# Altium PCB BSPD.PcbDoc (part 1 of 2)
Units mm, origin at the board's own origin, x right, y up, seen from the top; angles counter-clockwise.
Board outline 45 x 32.6 mm, 2 copper layers (Top Layer, Bottom Layer); 26 components, 20 nets, 79 pads, 28 vias.
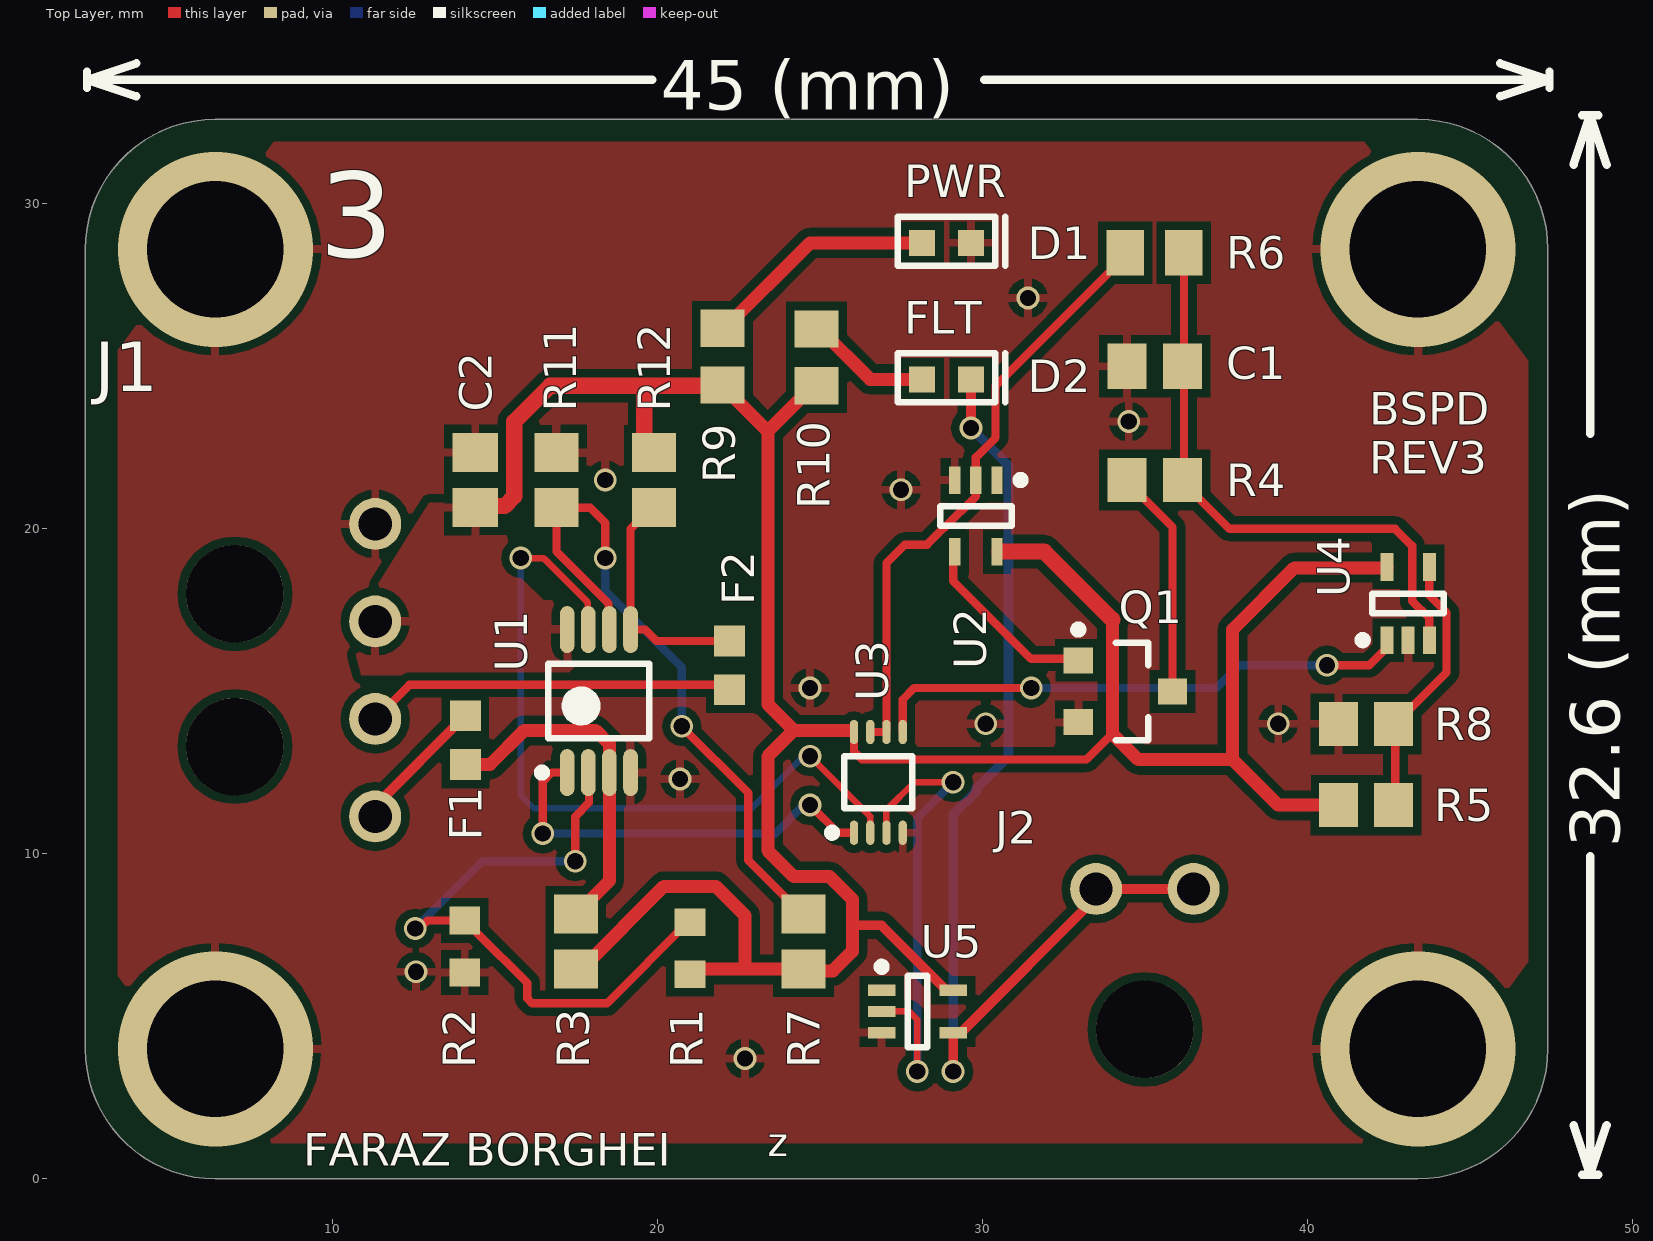
[diagram p0: Top Layer view]
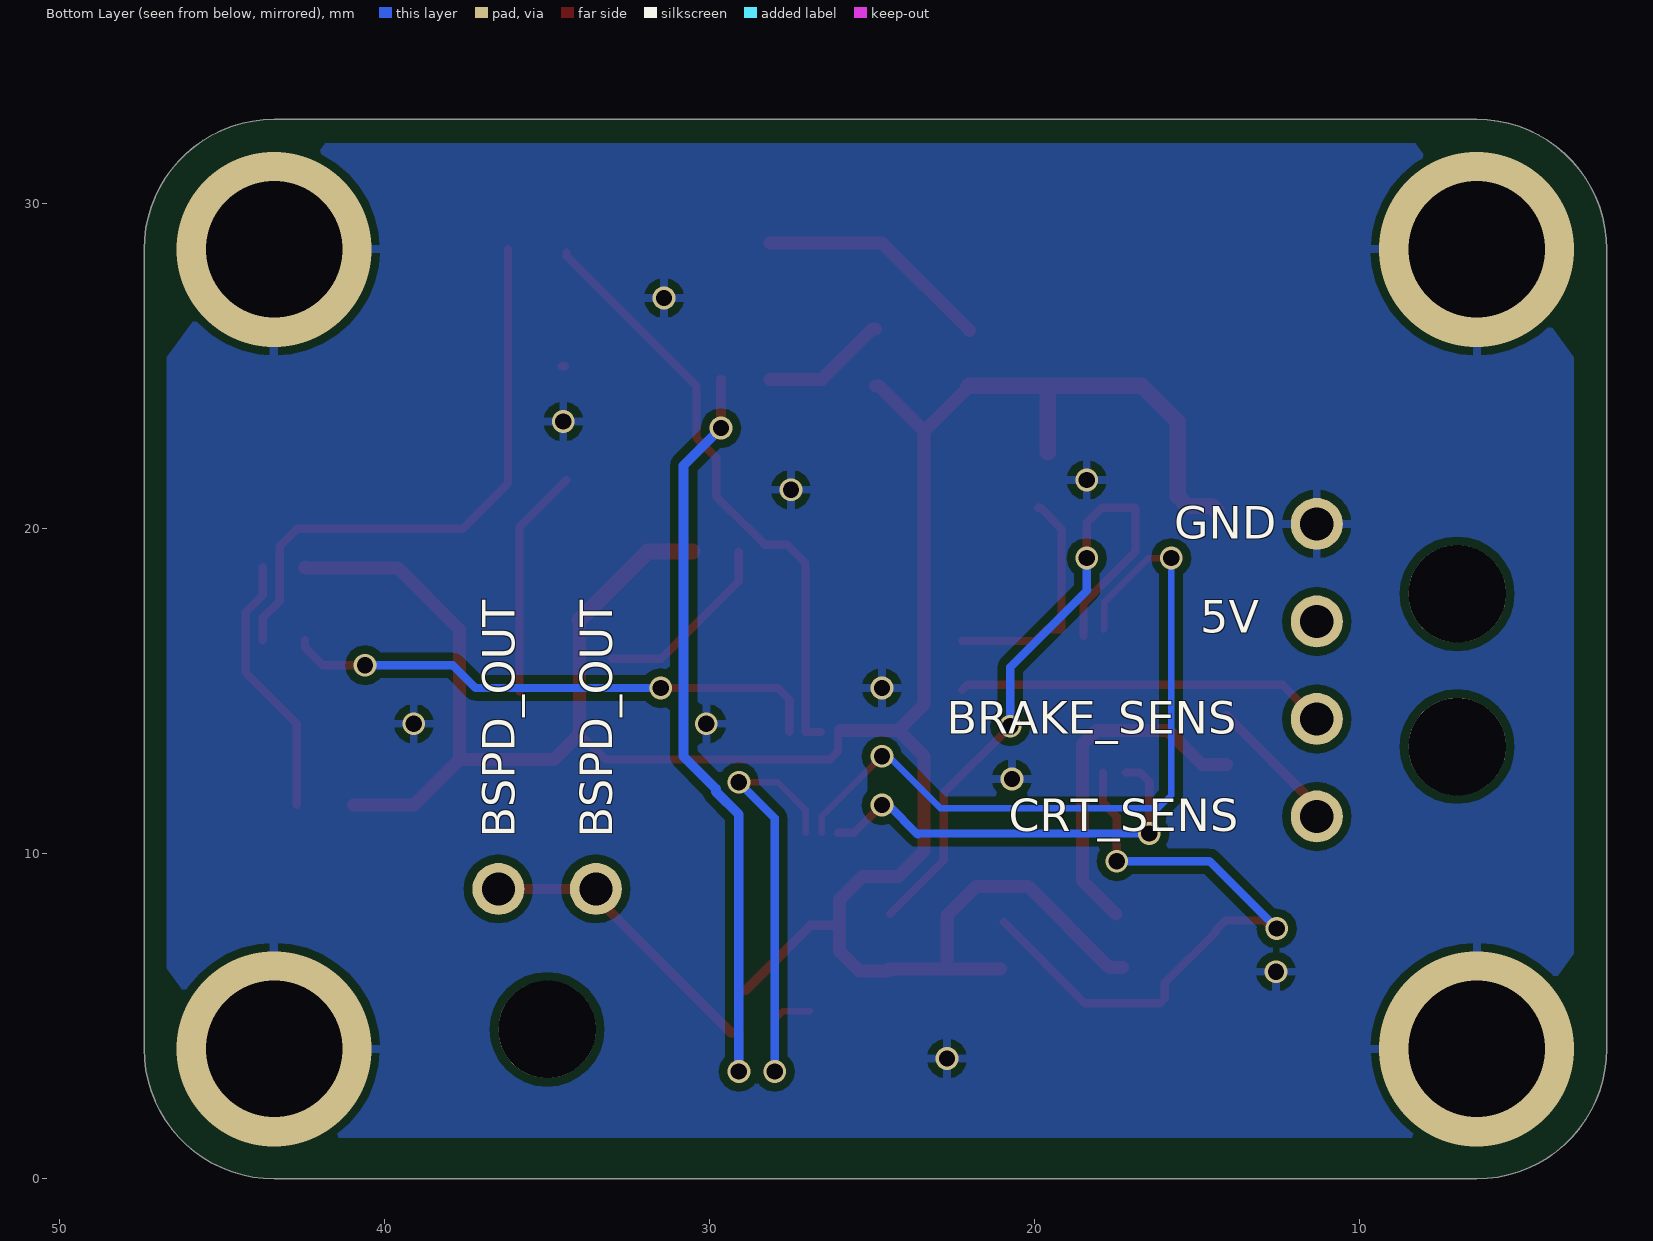
[diagram p1: Bottom Layer view, seen from below]
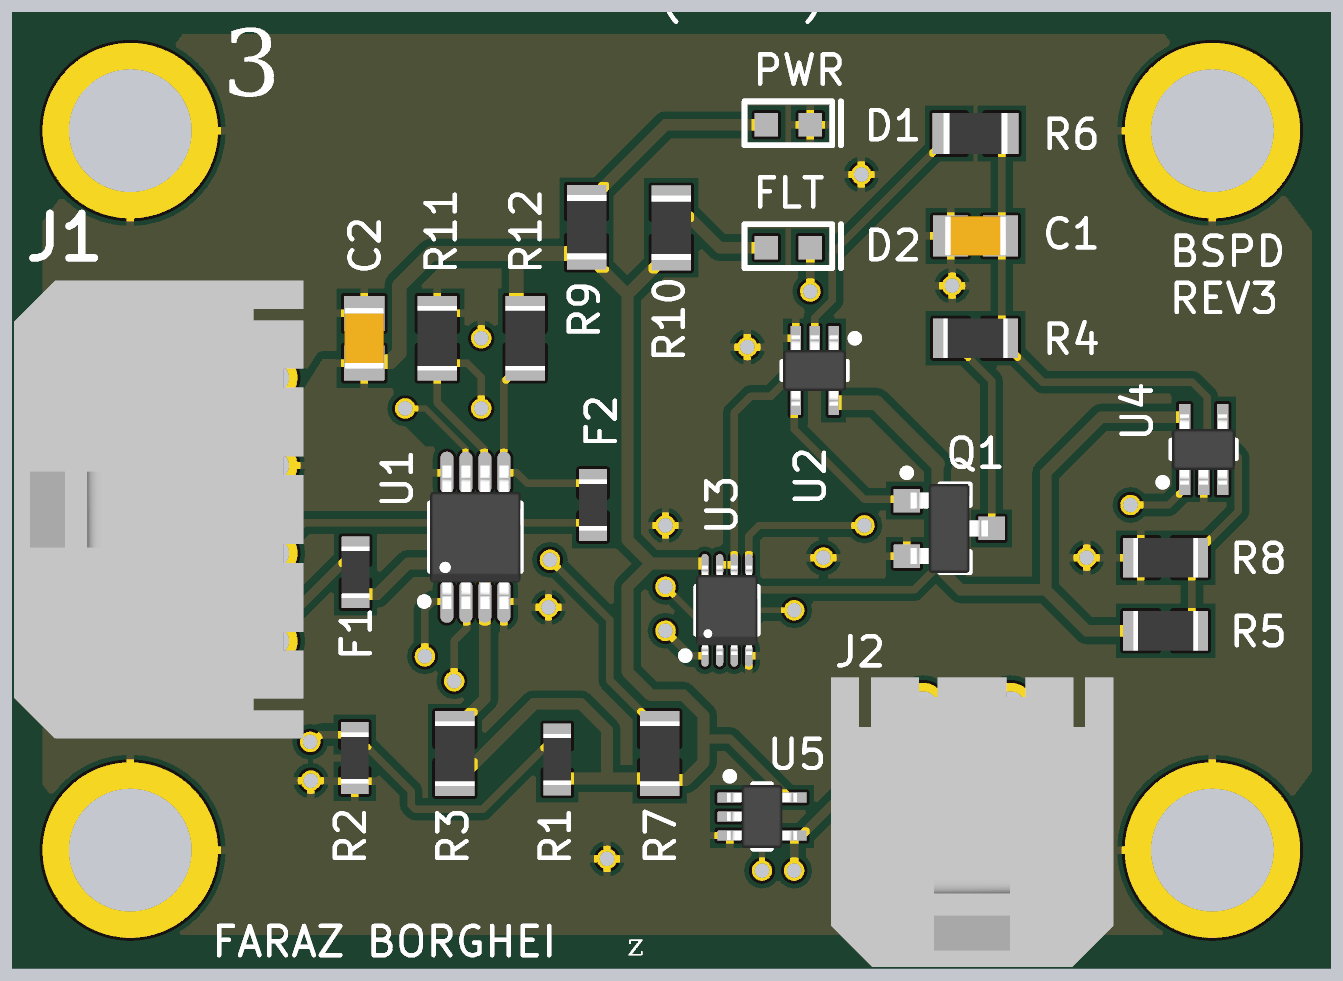
[diagram p2: 3D render of the assembled board from above, using the file's embedded part models]

## Layer stack, top to bottom
Top Solder: solder mask 0.0102, Solder Resist, Dk 3.5
Top Layer: signal copper 0.0356
Dielectric 1: dielectric 0.32, FR-4, Dk 4.8
Bottom Layer: signal copper 0.0356
Bottom Solder: solder mask 0.0102, Solder Resist, Dk 3.5

## Board outline
2.4,4 ccw(c6.4,4) 6.4,0 43.4,0 ccw(c43.4,4) 47.4,4 47.4,28.6 ccw(c43.4,28.6) 43.4,32.6 6.4,32.6 ccw(c6.4,28.6) 2.4,28.6

## Design rules (kind name [scope] priority, off if disabled: settings)
Clearance [All] p1: gap=0.254 ignorepadtopadclearanceinfootprint=TRUE except(0: Arc-Hole Track-Hole SMDPad-Hole THPad-Hole Via-Hole Fill-Hole Poly-Hole Region-Hole Text-Hole; 0.05: SMDPad-SMDPad; 0.2: Arc-Arc Arc-Track Arc-SMDPad Arc-Via Track-Track Track-SMDPad Track-Via)
HoleSize [All] p1: absolutevalues=TRUE maxlimit=5 minlimit=0.025 maxpercent=80.000 minpercent=20.000
MinimumSolderMaskSliver [All] p1: minsoldermaskwidth=0.1
PolygonConnect [All] p1: connectstyle=Relief reliefconductorwidth=0.254 reliefentries=4 polygonreliefangle="90 Angle" airgapwidth=0.254
RoutingVias [All] p1: holewidth=0.711 width=1.27 viastyle="Through Hole" minholewidth=0.711 minwidth=1.27 maxholewidth=0.711 maxwidth=1.27
SilkToSolderMaskClearance [IsPad] p1: minsilkscreentomaskgap=0.2 clearancetoexposedcopper=TRUE
SolderMaskExpansion [All] p1: expansion=0.102
UnConnectedPin [All] p1 off:
UnRoutedNet [All] p1: checkbadconnections=TRUE
Width [All] p1: maxlimit=1 minlimit=0.2 preferedwidth=0.254 minimp=50.000000 maximp=50.000000 favimp=50.000000
26 further rules are at their usual default settings.

## Components (designator, comment, footprint, x,y, rotation, side; value= is the part's Value field where it differs from the comment)
C1 "10uF" C0805 35.3,25 r0 top
C2 "10uF" C0805 14.4,21.5 r270 top
D1 "PWR" LED_0603 28.9,28.8 r0 top
D2 "FLT" LED_0603 28.9,24.6 r0 top
F1 "500mA" ERBRE-0603 14.1,13.5 r270 top
F2 "500mA" ERBRE-0603 22.225,15.8 r90 top
J1 "MOLEX4PIN" MOLEX_4PIN 11.32,11.15 r270 top
J2 "MOLEX2PIN" MOLEX_2PIN 36.5,8.92 r0 top
Q1 "MOSFET-N" MOSFET 34.4,15 r0 top
R1 "3.09K" ERJPB3 21,7.1 r270 top
R2 "3.3K" ERJPB3 14.075,7.15 r90 top
R3 "10K" R0805 17.5,7.3 r270 top
R4 "499" R0805 35.3,21.5 r0 top
R5 "3.48K" R0805 41.8,11.5 r180 top
R6 "50k" RESC2013X12N 35.3,28.5 r0 top
R7 "2K" R0805 24.5,7.3 r270 top
R8 "6.04K" R0805 41.8,14 r0 top
R9 "150" RESC2012X07N 22,25.3 r270 top
R10 "150" RESC2012X07N 24.9,25.275 r270 top
R11 "5.23K" R0805 16.9,21.5 r270 top
R12 "10K" R0805 19.9,21.5 r90 top
U1 "TLV3202AIDGK" TLV3202AIDGK 18.2,14.7 r90 top
U2 "SN74AHC1G04DCK" SN74AHC1G04DCK 29.8,20.4 r270 top
U3 "SN74LVC2G08DCU" SN74LVC2G08DCUR 26.8,12.2 r90 top
U4 "TLV3201AIDCKR" TLV3201AIDCK 43.1,17.7 r90 top
U5 "SN74AHC1G04DCK" SN74AHC1G04DCK 28,5.15 r0 top

## Footprints (in the part's own frame and the unit in brackets; to place one, negate y for a bottom-side part, rotate by r counter-clockwise, add the part's x,y. Pads: shape width x height; smd on the part's side, far side on the other; paste and mask are expansions set on the pad)
C0805 [mm] "Chip Capacitor, 2-Leads, Body 2.00x1.25mm, IPC Medium Density"
  rect 1.2x1.4 smd: 1(-0.85,0) 2(0.85,0)
  body extent -1.05,-0.67 1.05,0.67, height 1.35
ERBRE-0603 [mm] "500mA  AC 32V DC Fuse Board Mount (Cartridge Style Excluded) Surface Mount 0603 (1608 Metric)"
  rect 0.95x0.95 smd: 1(-0.75,0) 2(0.75,0)
  body extent -0.87,-0.48 0.87,0.48, height 0.64
ERJPB3 [mm]
  rect 0.85x0.95 smd: 1(-0.8,0) 2(0.8,0)
  body extent -0.87,-0.48 0.87,0.48, height 0.55
LED_0603 [mm]
  rect 0.8x0.8 smd: 1(-0.75,0) 2(0.75,0)
  silkscreen extent -1.5,-0.7 1.8,0.8
MOLEX_2PIN [mm]
  round 1.6 hole 1.02: 1(0,0) 2(-3,0)
  round 3 hole 3 unplated: 3(-1.5,-4.32)
  body extent -6.14,-8.91 3.51,0.99, height 5.64
MOLEX_4PIN [mm]
  round 1.6 hole 1.02: 1(0,0) 2(-3,0) 3(-6,0) 4(-9,0)
  round 3 hole 3 unplated: 5(-6.85,-4.32) 6(-2.15,-4.32)
  body extent -12.32,-8.9 3.33,1, height 5.64
MOSFET [mm] "SOT23, 3-Leads, Body 2.92x2.37mm, Pitch 0.95mm, IPC Medium Density"
  rect 0.9x0.8 smd: 1(-1.45,0.95) 2(-1.45,-0.95) 3(1.45,0)
  silkscreen extent -1.57,-1.5 0.7,2.02, body extent -1.32,-1.52 1.32,1.52, height 1.11
R0805 [mm] "Chip Resistor, 2-Leads, Body 2.00x1.25mm, IPC Medium Density"
  rect 1.2x1.35 smd: 1(-0.85,0) 2(0.85,0)
  body extent -1.1,-0.67 1.1,0.67, height 0.6
RESC2012X07N [mm] "Chip Resistor, 2-Leads, Body 2.00x1.25mm, IPC Medium Density"
  rect 1.15x1.35 smd: 1(-0.875,0) 2(0.875,0)
  body extent -1.1,-0.67 1.1,0.67, height 0.7
RESC2013X12N [mm] "Chip Resistor, 2-Leads, Body 2.03x1.27mm, IPC Medium Density"
  rect 1.15x1.4 smd: 1(-0.9,0) 2(0.9,0)
  body extent -1.09,-0.7 1.09,0.7, height 1.22
SN74AHC1G04DCK [mm] "SOT23, 5-Leads, Body 2.00x2.10mm, Pitch 0.65mm, IPC Medium Density"
  rect 0.85x0.35 smd: 1(-1.1,0.65) 2(-1.1,0) 3(-1.1,-0.65) 4(1.1,-0.65) 5(1.1,0.65)
  silkscreen extent -1.22,-1.1 0.3,1.5, body extent -1.2,-1.07 1.2,1.07, height 1.1
SN74LVC2G08DCUR [mm] "TSSOP, 8-Leads, Body 2.00x2.30mm, Pitch 0.50mm, IPC Medium Density"
  oval 0.75x0.25 smd: 1(-1.55,0.75) 2(-1.55,0.25) 3(-1.55,-0.25) 4(-1.55,-0.75) 5(1.55,-0.75) 6(1.55,-0.25) 7(1.55,0.25) 8(1.55,0.75)
  silkscreen extent -1.67,-1.05 0.8,1.55, body extent -1.55,-1.05 1.55,1.05, height 0.9
TLV3201AIDCK [mm] "SOT23, 5-Leads, Body 2.00x2.10mm, Pitch 0.65mm, IPC Medium Density"
  rect 0.85x0.4 smd: 1(-1.125,0.65) 2(-1.125,0) 3(-1.125,-0.65) 4(1.125,-0.65) 5(1.125,0.65)
  silkscreen extent -1.25,-1.1 0.3,1.52, body extent -1.2,-1.07 1.2,1.07, height 1.1
TLV3202AIDGK [mm] "TSOP, 8-Leads, Body 3.00x3.00mm, Pitch 0.65mm, IPC Medium Density"
  oval 1.45x0.45 smd: 1(-2.2,0.975) 2(-2.2,0.325) 3(-2.2,-0.325) 4(-2.2,-0.975) 5(2.2,-0.975) 6(2.2,-0.325) 7(2.2,0.325) 8(2.2,0.975)
  silkscreen extent -2.32,-1.55 1.15,1.87, body extent -2.45,-1.55 2.45,1.55, height 1.1

## Part data
C1 C2: library part CL21A106KPFNNNG, "Cap Ceramic 10uF 10V X5R 10% SMD 0805 85C Embossed T/R", Case/Package=0805, Case Code (Metric)=2012, Dielectric=X5R, Manufacturer=Samsung, Max Operating Temperature=85°C, Min Operating Temperature=-55°C, Package Quantity=3000, Supplier Part Number 1=1276-6456-1-ND, Tolerance=10%, Voltage=10V, Capacitance=10uF, Case Code (Imperial)=0805, ComponentLink1Description=http://www1.futureelectronics.com/doc/SAMSUNG/CL21A106KPFNNNG.pdf?src-supplier=Future+Electronics, ComponentLink1URL=http://www1.futureelectronics.com/doc/SAMSUNG/CL21A106KPFNNNG.pdf?src-supplier=Future+Electronics, ComponentLink2Description=https://www.verical.com/server-webapp/html/getDatasheet?partID=640497&src-supplier=Verical, ComponentLink2URL=https://www.verical.com/server-webapp/html/getDatasheet?partID=640497&src-supplier=Verical, Depth=1.25mm, Height=1.25mm, Lead Free="Lead Free", Length=2mm, Manufacturer Part Number=CL21A106KPFNNNG, Mount="Surface Mount", Packaging="Tape and Reel", Pricing 1="1=0.15, 10=0.104, 100=0.0489, 500=0.03428, 1000=0.02837 (USD)", Radiation Hardening=No, Stock 1=0, Supplier 1=Digi-Key, Termination=Wraparound, Thickness=0.053inch, Voltage Rating=10V, Width=0.049inch
D1: library part LTST-C191KGKT, "LED GREEN CLEAR SMD", Case/Package=0603, Case Code (Metric)=1608, Color=Green, Forward Current=30mA, Forward Voltage=2V, Lens Color=Colorless, Manufacturer="Vishay Lite-On", Max Operating Temperature=85°C, Min Operating Temperature=-55°C, Package Quantity=1, Power Dissipation=75mW, Reverse Voltage=5V, Supplier Part Number 1=160-1446-1-ND, Test Current=20mA, Case Code (Imperial)=0603, ComponentLink1Description=http://www.mouser.com/ds/2/239/LTST-C191KGKT-1141954.pdf?src-supplier=Mouser, ComponentLink1URL=http://www.mouser.com/ds/2/239/LTST-C191KGKT-1141954.pdf?src-supplier=Mouser, ComponentLink2Description=http://optoelectronics.liteon.com/upload/download/DS22-2000-228/LTST-C191KGKT.PDF?src-supplier=Digi-Key, ComponentLink2URL=http://optoelectronics.liteon.com/upload/download/DS22-2000-228/LTST-C191KGKT.PDF?src-supplier=Digi-Key, ComponentLink3Description=https://www.verical.com/server-webapp/html/getDatasheet?partID=103913&src-supplier=Verical, ComponentLink3URL=https://www.verical.com/server-webapp/html/getDatasheet?partID=103913&src-supplier=Verical, ComponentLink4Description=http://uk.rs-online.com/webdocs/0dc0/0900766b80dc02b1.pdf?src-supplier=RSComponents, ComponentLink4URL=http://uk.rs-online.com/webdocs/0dc0/0900766b80dc02b1.pdf?src-supplier=RSComponents, ComponentLink5Description=http://www1.futureelectronics.com/doc/LITE-ON/LTST-C191KGKT.pdf?src-supplier=Future+Electronics, ComponentLink5URL=http://www1.futureelectronics.com/doc/LITE-ON/LTST-C191KGKT.pdf?src-supplier=Future+Electronics, Depth=0.8mm, Dominant Wavelength=571nm, Height=0.55mm, Illumination Color=Green, Lead Free="Lead Free", Length=1.6mm, Lens Style=Diffused,Colorless,Rectangular,Clear, Lens Transparency=Clear, Luminous Intensity=35mcd, Manufacturer Part Number=LTST-C191KGKT, Mount="Surface Mount", Number of Elements=1, Number of LEDs=1, Number of Pins=2, Packaging="Tape and Reel", Power Rating=75mW, Pricing 1="1=0.29, 10=0.211, 25=0.1556, 100=0.1111, 250=0.07556, 500=0.06666, 1000=0.05222, 2500=0.05111 (USD)", Radiation Hardening=No, Stock 1=1356717, Supplier 1=Digi-Key, Viewing Angle=130°, Wavelength=574nm, Width=0.8mm
D2: library part LTST-C191KRKT, "LED RED CLEAR SMD", Case/Package=0603, Case Code (Metric)=1608, Color=Red, Forward Current=30mA, Forward Voltage=2V, Lens Color=Colorless, Manufacturer="Vishay Lite-On", Max Operating Temperature=85°C, Min Operating Temperature=-55°C, Package Quantity=1, Power Dissipation=75mW, Reverse Voltage=5V, Supplier Part Number 1=160-1447-1-ND, Test Current=20mA, Case Code (Imperial)=0603, ComponentLink1Description=http://optoelectronics.liteon.com/upload/download/DS22-2000-223/LTST-C191KRKT.PDF?src-supplier=Digi-Key, ComponentLink1URL=http://optoelectronics.liteon.com/upload/download/DS22-2000-223/LTST-C191KRKT.PDF?src-supplier=Digi-Key, ComponentLink2Description=http://www1.futureelectronics.com/doc/LITE-ON/LTST-C191KRKT.pdf?src-supplier=Future+Electronics, ComponentLink2URL=http://www1.futureelectronics.com/doc/LITE-ON/LTST-C191KRKT.pdf?src-supplier=Future+Electronics, ComponentLink3Description=https://www.verical.com/server-webapp/html/getDatasheet?partID=141922&src-supplier=Verical, ComponentLink3URL=https://www.verical.com/server-webapp/html/getDatasheet?partID=141922&src-supplier=Verical, ComponentLink4Description=http://www.mouser.com/ds/2/239/LTST-C191KRKT-1140668.pdf?src-supplier=Mouser, ComponentLink4URL=http://www.mouser.com/ds/2/239/LTST-C191KRKT-1140668.pdf?src-supplier=Mouser, Depth=0.8mm, Dominant Wavelength=631nm, Height=0.55mm, Illumination Color=Red, Lead Free="Lead Free", Length=1.6mm, Lens Style=Clear,Diffused,Colorless,Rectangular, Lens Transparency=Clear, Luminous Intensity=54mcd, Manufacturer Part Number=LTST-C191KRKT, Mount="Surface Mount", Number of Elements=1, Number of LEDs=1, Number of Pins=2, Packaging="Tape and Reel", Power Rating=75mW, Pricing 1="1=0.29, 10=0.211, 25=0.1556, 100=0.1111, 250=0.07556, 500=0.06666, 1000=0.05222, 2500=0.05111 (USD)", Radiation Hardening=No, Stock 1=1012880, Supplier 1=Digi-Key, Viewing Angle=130°, Voltage=2V, Wavelength=639nm, Width=0.8mm
F1 F2: library part ERB-RE0R50V, "FUSE BOARD MNT 500MA 32VDC 0603", Case/Package=0603, Case Code (Metric)=1608, DC Cold Resistance=330mR, Manufacturer=Panasonic, Max Operating Temperature=125°C, Max Voltage Rating (DC)=32V, Min Operating Temperature=-40°C, Package Quantity=5000, Supplier Part Number 1=P15127CT-ND, Approvals=UL, Body Material=Alumina, Case Code (Imperial)=0603, ComponentLink1Description=https://datasheet.ciiva.com/25619/0900766b810c2f76-25619783.pdf?src-supplier=RSComponents, ComponentLink1URL=https://datasheet.ciiva.com/25619/0900766b810c2f76-25619783.pdf?src-supplier=RSComponents, ComponentLink2Description=https://datasheet.ciiva.com/299/afa0000ce6-299092.pdf?src-supplier=Digi-Key, ComponentLink2URL=https://datasheet.ciiva.com/299/afa0000ce6-299092.pdf?src-supplier=Digi-Key, ComponentLink3Description=https://datasheet.ciiva.com/299/afa0000ce6-299094.pdf?src-supplier=Digi-Key, ComponentLink3URL=https://datasheet.ciiva.com/299/afa0000ce6-299094.pdf?src-supplier=Digi-Key, ComponentLink4Description=https://datasheet.ciiva.com/30017/afa0000ce6-30017405.pdf?src-supplier=Avnet, ComponentLink4URL=https://datasheet.ciiva.com/30017/afa0000ce6-30017405.pdf?src-supplier=Avnet, ComponentLink5Description=https://datasheet.ciiva.com/46376/1328695-46376557.pdf?src-supplier=Element14, ComponentLink5URL=https://datasheet.ciiva.com/46376/1328695-46376557.pdf?src-supplier=Element14, ComponentLink6Description=https://datasheet.ciiva.com/299/afa0000ce6-299093.pdf?src-supplier=Digi-Key, ComponentLink6URL=https://datasheet.ciiva.com/299/afa0000ce6-299093.pdf?src-supplier=Digi-Key, ComponentLink7Description=https://datasheet.ciiva.com/11337/afa0000ce6-11337817.pdf?src-supplier=Avnet, ComponentLink7URL=https://datasheet.ciiva.com/11337/afa0000ce6-11337817.pdf?src-supplier=Avnet, ComponentLink8Description=https://datasheet.ciiva.com/5813/1328695-5813626.pdf?src-supplier=Farnell, ComponentLink8URL=https://datasheet.ciiva.com/5813/1328695-5813626.pdf?src-supplier=Farnell, ComponentLink9Description=https://datasheet.ciiva.com/46388/1328695-46388892.pdf?src-supplier=Element14, ComponentLink9URL=https://datasheet.ciiva.com/46388/1328695-46388892.pdf?src-supplier=Element14, Current=500mA, Current Rating=500mA, Depth=0.8mm, Fuse Current=500mA, Fuse Type="Board Mount (Cartridge Style Excluded)", Height=0.54mm, Length=1.6mm, Manufacturer Part Number=ERB-RE0R50V, Mount="Surface Mount", Number of Pins=2, Packaging="Tape and Reel", Pricing 1="1=0.29000, 5=0.28400, 10=0.27200, 50=0.24240, 100=0.22570, 250=0.20064, 500=0.16720, 1000=0.15884 (USD)", Radiation Hardening=No, REACH SVHC="No SVHC", RoHS=Yes, Stock 1=4248, Supplier 1=Digi-Key, Voltage Rating=32V, Voltage Rating (DC)=32V, Width=0.8mm
J1: library part 43650-0400, "MOLEX         43650-0400             Wire-To-Board Connector, Micro-Fit 3.0 43650 Series, Solder, Header, 4 Contacts, 3 mm", Colour=Black, Contact Resistance=10mR, Current Rating=5A, Flammability Rating="UL94 V-0", Manufacturer=Molex, Max Operating Temperature=105°C, Max Voltage Rating (AC)=600V, Min Operating Temperature=-40°C, Package Quantity=2380, Supplier Part Number 1=WM1862-ND, Voltage Rating (DC)=250V, ComponentLink1Description=http://uk.rs-online.com/webdocs/1362/0900766b81362fcc.pdf, ComponentLink1URL=http://uk.rs-online.com/webdocs/1362/0900766b81362fcc.pdf, ComponentLink2Description=http://www.molex.com/webdocs/datasheets/pdf/en-us/0436500400_PCB_HEADERS.pdf, ComponentLink2URL=http://www.molex.com/webdocs/datasheets/pdf/en-us/0436500400_PCB_HEADERS.pdf, ComponentLink3Description=https://www.alliedelec.com/m/d/479cb0864148560b2cdf92342e899bdb.pdf, ComponentLink3URL=https://www.alliedelec.com/m/d/479cb0864148560b2cdf92342e899bdb.pdf, ComponentLink4Description=http://www.onlinecomponents.com/productFiles/mf-MOL/0436500400_pcb_headers.pdf, ComponentLink4URL=http://www.onlinecomponents.com/productFiles/mf-MOL/0436500400_pcb_headers.pdf, ComponentLink5Description=http://www.mouser.com/ds/2/276/0436500400_PCB_HEADERS-148663.pdf, ComponentLink5URL=http://www.mouser.com/ds/2/276/0436500400_PCB_HEADERS-148663.pdf, ComponentLink6Description=http://www.jameco.com/Jameco/Products/ProdDS/884184.pdf, ComponentLink6URL=http://www.jameco.com/Jameco/Products/ProdDS/884184.pdf, Connector Type=Plug,Socket, Contact Material="Brass,Copper Alloy", Contact Plating=Bright,Tin, Depth=3.6mm, Gender=Male, Glow Wire Compliant=Compliant, Halogen Free="Low Halogen", Height=4.5mm, Housing Colour=Black, Housing Material=Thermoplastic, Lead Free="Contains Lead", Length=14.86mm, Manufacturer Part Number=43650-0400, Mount="Cable,Through Hole", Number of Circuits=4, Number of Contacts=4, Number of Positions=4, Number of Rows=1, Orientation="Right Angle", Packaging=Tray, Pitch=3mm, Pricing 1="1=1.36, 10=1.23, 100=1.054, 500=0.87832, 2380=0.72776, 7140=0.66753, 11900=0.65247 (USD)", Radiation Hardening=No, REACH SVHC=Unknown, Stock 1=1256, Supplier 1=Digi-Key, Termination=Solder, Voltage Rating=600V
J2: library part 43650-0200, "Headers & Wire Housings R/A HEADER 2 POS TIN SINGLE ROW", Colour=Black, Contact Resistance=10mR, Current Rating=5A, Flammability Rating="UL94 V-0", Insulation Resistance=1GR, Manufacturer=Molex, Max Operating Temperature=105°C, Min Operating Temperature=-40°C, Package Quantity=3927, Supplier Part Number 1=WM1860-ND, Voltage Rating=600V, Voltage Rating (AC)=250V, ComponentLink1Description=http://www.molex.com/webdocs/datasheets/pdf/en-us/0436500200_PCB_HEADERS.pdf, ComponentLink1URL=http://www.molex.com/webdocs/datasheets/pdf/en-us/0436500200_PCB_HEADERS.pdf, ComponentLink2Description=http://www.onlinecomponents.com/productFiles/mf-MOL/1029720436500200_pcb_headers.pdf, ComponentLink2URL=http://www.onlinecomponents.com/productFiles/mf-MOL/1029720436500200_pcb_headers.pdf, ComponentLink3Description=http://www.farnell.com/datasheets/1933359.pdf, ComponentLink3URL=http://www.farnell.com/datasheets/1933359.pdf, ComponentLink4Description=https://www.distrelec.biz/Web/Downloads/20/66/04402066.pdf?mime=application%2Fpdf, ComponentLink4URL=https://www.distrelec.biz/Web/Downloads/20/66/04402066.pdf?mime=application%2Fpdf, ComponentLink5Description=http://www.jameco.com/Jameco/Products/ProdDS/884053.pdf, ComponentLink5URL=http://www.jameco.com/Jameco/Products/ProdDS/884053.pdf, ComponentLink6Description=http://www.mouser.com/ds/2/276/0436500200_PCB_HEADERS-148844.pdf, ComponentLink6URL=http://www.mouser.com/ds/2/276/0436500200_PCB_HEADERS-148844.pdf, ComponentLink7Description=http://uk.rs-online.com/webdocs/13c3/0900766b813c3b7d.pdf, ComponentLink7URL=http://uk.rs-online.com/webdocs/13c3/0900766b813c3b7d.pdf, ComponentLink8Description=http://www.farnell.com/datasheets/1709823.pdf, ComponentLink8URL=http://www.farnell.com/datasheets/1709823.pdf, Connector Type=Plug,Socket, Contact Material=Brass,Tin, Contact Plating=Tin, Depth=9.9mm, Gender=Male, Glow Wire Compliant=Compliant, Halogen Free="Low Halogen", Height=5.57mm, Housing Colour=Black, Housing Material=Thermoplastic, Lead Free="Lead Free", Length=9.65mm, Manufacturer Part Number=43650-0200, Mount="Through Hole", Number of Circuits=2, Number of Contacts=2, Number of Positions=2, Number of Rows=1, Orientation="Right Angle", Packaging=Tray, Pitch=3mm, Pricing 1="1=0.96, 10=0.841, 100=0.7256, 500=0.59364, 3927=0.47821, 7854=0.46172, 11781=0.43863 (USD)", Radiation Hardening=No, REACH SVHC=Unknown, Stock 1=33161, Supplier 1=Digi-Key, Termination=Solder, Voltage Rating (DC)=250V, Working Voltage=250V
Q1: library part BSS138LT3G, "MOSFET N-CH 50V 200MA SOT-23", Case/Package=SOT-23-3, Continuous Drain Current (ID)=200mA, Drain to Source Breakdown Voltage=50V, Drain to Source Resistance=3.5R, Gate to Source Voltage (Vgs)=20V, Input Capacitance=50pF, Manufacturer="ON Semiconductor", Max Operating Temperature=150°C, Max Power Dissipation=225mW, Min Operating Temperature=-55°C, Package Quantity=1, Supplier Part Number 1=BSS138LT3GOSCT-ND, Threshold Voltage=500mV, ComponentLink1Description=DigiKey, ComponentLink1URL=https://www.digikey.ca/product-detail/en/BSS138LT3G/BSS138LT3GOSCT-ND/2120566/?itemSeq=274498102, Current Rating=200mA, Drain to Source Voltage (Vdss)=50V, Element Configuration=Single, Halogen Free="Halogen Free", Height=0.94mm, Lead Free="Lead Free", Length=2.9mm, Manufacturer Part Number=BSS138LT3G, Nominal Vgs=500mV, Number of Elements=1, Number of Pins=3, On-State Resistance=3.5R, Packaging="Tape and Reel", Power Dissipation=225mW, Pricing 1="1=0.45, 10=0.408, 100=0.2284, 500=0.12234, 1000=0.0832 (USD)", Radiation Hardening=No, Rds On Max=3.5R, REACH SVHC="No SVHC", Stock 1=195647, Supplier 1=Digi-Key, Turn-Off Delay Time=20ns, Turn-On Delay Time=20ns, Voltage Rating (DC)=50V, Width=1.3mm
R1: library part ERJ-PB3B3091V, "RES SMD 3.09K OHM 0.1% 1/5W 0603", Case/Package=0603, Case Code (Metric)=1608, Manufacturer=Panasonic, Max Operating Temperature=155°C, Max Power Dissipation=200mW, Min Operating Temperature=-55°C, Resistance=3.09kR, Supplier Part Number 1=P20026CT-ND, Temperature Coefficient=50ppm/°C, Tolerance=0.1%, Case Code (Imperial)=0603, ComponentLink1Description=https://industrial.panasonic.com/sa/system/files/data/download/catalog/id_fixed-resistors_e_2.pdf?src-supplier=Digi-Key, ComponentLink1URL=https://industrial.panasonic.com/sa/system/files/data/download/catalog/id_fixed-resistors_e_2.pdf?src-supplier=Digi-Key, Composition="Thick Film", Features="Automotive AEC-Q200", Height - Seated (Max)=0.022inch, Length=0.063inch, Manufacturer Part Number=ERJ-PB3B3091V, Number of Terminations=2, Packaging="Tape and Reel", Pricing 1="1=0.25000, 10=0.21100, 25=0.15320, 50=0.11100, 100=0.08230, 250=0.06316, 500=0.04976, 1000=0.03445 (USD)", RoHS=Yes, Stock 1=4580, Supplier 1=Digi-Key, Width=0.032inch
R2: library part ERJ-PB3B3301V, "RES SMD 3.3K OHM 0.1% 1/5W 0603", Case/Package=0603, Case Code (Metric)=1608, Manufacturer=Panasonic, Max Operating Temperature=155°C, Max Power Dissipation=200mW, Min Operating Temperature=-55°C, Resistance=3.3kR, Supplier Part Number 1=P20029CT-ND, Temperature Coefficient=50ppm/°C, Tolerance=0.1%, Case Code (Imperial)=0603, ComponentLink1Description=https://industrial.panasonic.com/cdbs/www-data/pdf/RDM0000/DMM0000COL5.pdf?src-supplier=Digi-Key, ComponentLink1URL=https://industrial.panasonic.com/cdbs/www-data/pdf/RDM0000/DMM0000COL5.pdf?src-supplier=Digi-Key, Composition="Thick Film", Features="Automotive AEC-Q200", Height - Seated (Max)=0.022inch, Length=0.063inch, Manufacturer Part Number=ERJ-PB3B3301V, Number of Terminations=2, Packaging="Tape and Reel", Pricing 1="1=0.25000, 10=0.21100, 25=0.15320, 50=0.11100, 100=0.08230, 250=0.06316, 500=0.04976, 1000=0.03445 (USD)", RoHS=Yes, Stock 1=3105, Supplier 1=Digi-Key, Width=0.032inch
R3 R12: library part ERA6AEB103V, "RES SMD 10K OHM 0.1% 1/8W 0805", Case/Package=0805, Case Code (Metric)=2012, Manufacturer=Panasonic, Max Operating Temperature=155°C, Max Power Dissipation=125mW, Min Operating Temperature=-55°C, Package Quantity=5000, Resistance=10kR, Supplier Part Number 1=P10KDACT-ND, Temperature Coefficient=25ppm/°C, Tolerance=0.1%, Voltage Rating=100V, Case Code (Imperial)=0805, ComponentLink1Description=http://uk.rs-online.com/webdocs/0bee/0900766b80beefcc.pdf?src-supplier=RSComponents, ComponentLink1URL=http://uk.rs-online.com/webdocs/0bee/0900766b80beefcc.pdf?src-supplier=RSComponents, ComponentLink2Description=http://www.farnell.com/datasheets/2052875.pdf?src-supplier=Farnell, ComponentLink2URL=http://www.farnell.com/datasheets/2052875.pdf?src-supplier=Farnell, ComponentLink3Description=http://www.farnell.com/datasheets/485442.pdf?src-supplier=Element14, ComponentLink3URL=http://www.farnell.com/datasheets/485442.pdf?src-supplier=Element14, ComponentLink4Description=http://www.mouser.com/ds/2/315/AOA0000CE26-197354.pdf?src-supplier=Mouser, ComponentLink4URL=http://www.mouser.com/ds/2/315/AOA0000CE26-197354.pdf?src-supplier=Mouser, ComponentLink5Description=https://www.distrelec.biz/Web/Downloads/_t/ds/ERA_eng_tds.pdf?mime=application%2Fpdf&src-supplier=Distrelec, ComponentLink5URL=https://www.distrelec.biz/Web/Downloads/_t/ds/ERA_eng_tds.pdf?mime=application%2Fpdf&src-supplier=Distrelec, ComponentLink6Description=http://industrial.panasonic.com/www-data/pdf/AOA0000/AOA0000CE26.pdf?src-supplier=Avnet, ComponentLink6URL=http://industrial.panasonic.com/www-data/pdf/AOA0000/AOA0000CE26.pdf?src-supplier=Avnet, ComponentLink7Description=https://industrial.panasonic.com/cdbs/www-data/pdf/RDM0000/AOA0000C307.pdf?src-supplier=Future+Electronics, ComponentLink7URL=https://industrial.panasonic.com/cdbs/www-data/pdf/RDM0000/AOA0000C307.pdf?src-supplier=Future+Electronics, ComponentLink8Description=http://www.alliedelec.com/m/d/b6b0537e86f421aa7f5975bb1d8f429a.pdf?src-supplier=Allied+Electronics, ComponentLink8URL=http://www.alliedelec.com/m/d/b6b0537e86f421aa7f5975bb1d8f429a.pdf?src-supplier=Allied+Electronics, ComponentLink9Description=http://www.farnell.com/datasheets/2059650.pdf?src-supplier=Element14, ComponentLink9URL=http://www.farnell.com/datasheets/2059650.pdf?src-supplier=Element14, ComponentLink10Description=http://www.farnell.com/datasheets/485442.pdf?src-supplier=Farnell, ComponentLink10URL=http://www.farnell.com/datasheets/485442.pdf?src-supplier=Farnell, ComponentLink11Description=http://www.produktinfo.conrad.com/datenblaetter/450000-474999/453339-da-01-en-WIDERSTAND_0805_ERA.pdf?src-supplier=Conrad, ComponentLink11URL=http://www.produktinfo.conrad.com/datenblaetter/450000-474999/453339-da-01-en-WIDERSTAND_0805_ERA.pdf?src-supplier=Conrad, Composition="Metal Film,Thin Film", Contact Plating=Tin, Depth=1.25mm, Height=0.5mm, Lead Free="Lead Free", Length=2mm, Manufacturer Part Number=ERA6AEB103V, Military Standard=Not, Mount="Surface Mount", Number of Pins=2, Number of Terminations=2, Packaging="Tape and Reel", Power Rating=125mW, Pricing 1="1=0.36, 10=0.302, 100=0.1182, 1000=0.04948, 2500=0.04536 (USD)", Radiation Hardening=No, REACH SVHC="No SVHC", Stock 1=677238, Supplier 1=Digi-Key, Termination=SMD/SMT, Voltage Rating (DC)=100V, Width=1.25mm, Working Voltage=100V
R4: library part ERA-6AEB4990V, "RES SMD 499 OHM 0.1% 1/8W 0805", Case/Package=0805, Case Code (Metric)=2012, Manufacturer=Panasonic, Max Operating Temperature=155°C, Max Power Dissipation=125mW, Min Operating Temperature=-55°C, Package Quantity=5000, Resistance=499R, Supplier Part Number 1=P499DACT-ND, Temperature Coefficient=25ppm/°C, Tolerance=0.1%, Voltage Rating=200V, Voltage Rating (DC)=100V, Case Code (Imperial)=0805, ComponentLink1Description=http://uk.rs-online.com/webdocs/0eb1/0900766b80eb1d8c.pdf?src-supplier=RSComponents, ComponentLink1URL=http://uk.rs-online.com/webdocs/0eb1/0900766b80eb1d8c.pdf?src-supplier=RSComponents, ComponentLink2Description=http://www.farnell.com/datasheets/485442.pdf?src-supplier=Farnell, ComponentLink2URL=http://www.farnell.com/datasheets/485442.pdf?src-supplier=Farnell, ComponentLink3Description=http://www.farnell.com/datasheets/2052875.pdf?src-supplier=Farnell, ComponentLink3URL=http://www.farnell.com/datasheets/2052875.pdf?src-supplier=Farnell, ComponentLink4Description=http://industrial.panasonic.com/www-data/pdf/AOA0000/AOA0000CE26.pdf?src-supplier=Avnet+Europe, ComponentLink4URL=http://industrial.panasonic.com/www-data/pdf/AOA0000/AOA0000CE26.pdf?src-supplier=Avnet+Europe, ComponentLink5Description=http://www.farnell.com/datasheets/485442.pdf?src-supplier=Element14, ComponentLink5URL=http://www.farnell.com/datasheets/485442.pdf?src-supplier=Element14, ComponentLink6Description=http://industrial.panasonic.com/www-data/pdf/AOA0000/AOA0000CE26.pdf?src-supplier=Avnet, ComponentLink6URL=http://industrial.panasonic.com/www-data/pdf/AOA0000/AOA0000CE26.pdf?src-supplier=Avnet, ComponentLink7Description=https://produktinfo.conrad.com/datenblaetter/450000-474999/459335-da-01-en-WIDERSTAND_0805_ERA.pdf?src-supplier=Conrad, ComponentLink7URL=https://produktinfo.conrad.com/datenblaetter/450000-474999/459335-da-01-en-WIDERSTAND_0805_ERA.pdf?src-supplier=Conrad, Composition="Metal Film,Thin Film", Contact Plating=Tin, Depth=1.25mm, Height=0.5mm, Lead Free="Lead Free", Length=2mm, Manufacturer Part Number=ERA-6AEB4990V, Military Standard=Not, Mount="Surface Mount", Number of Pins=2, Number of Terminations=2, Packaging="Tape and Reel", Power Rating=125mW, Pricing 1="1=0.36, 10=0.302, 100=0.1182, 1000=0.04948, 2500=0.04536 (USD)", Radiation Hardening=No, REACH SVHC="No SVHC", Stock 1=110604, Supplier 1=Digi-Key, Termination=SMD/SMT, Width=1.25mm, Working Voltage=100V
R5: library part ERA-6AEB3481V, "RES SMD 3.48K OHM 0.1% 1/8W 0805", Case/Package=0805, Case Code (Metric)=2012, Manufacturer=Panasonic, Max Operating Temperature=155°C, Max Power Dissipation=125mW, Min Operating Temperature=-55°C, Package Quantity=1, Resistance=3.48kR, Supplier Part Number 1=P3.48KDACT-ND, Temperature Coefficient=25ppm/°C, Tolerance=0.1%, Voltage Rating=100V, Case Code (Imperial)=0805, ComponentLink1Description=https://datasheet.ciiva.com/11810/0900766b80eb1d8c-11810465.pdf?src-supplier=RSComponents, ComponentLink1URL=https://datasheet.ciiva.com/11810/0900766b80eb1d8c-11810465.pdf?src-supplier=RSComponents, ComponentLink2Description=https://datasheet.ciiva.com/41450/001181278-da-01-en-widerstand-era-0805-3k48-0-1-5000st-41450436.pdf?src-supplier=Conrad, ComponentLink2URL=https://datasheet.ciiva.com/41450/001181278-da-01-en-widerstand-era-0805-3k48-0-1-5000st-41450436.pdf?src-supplier=Conrad, ComponentLink3Description=https://datasheet.ciiva.com/9196/aoa0000ce26-9196342.pdf?src-supplier=Avnet, ComponentLink3URL=https://datasheet.ciiva.com/9196/aoa0000ce26-9196342.pdf?src-supplier=Avnet, ComponentLink4Description=https://datasheet.ciiva.com/24026/aoa0000ce26-32660-24026342.pdf?src-supplier=Mouser, ComponentLink4URL=https://datasheet.ciiva.com/24026/aoa0000ce26-32660-24026342.pdf?src-supplier=Mouser, ComponentLink5Description=https://datasheet.ciiva.com/5974/485442-5974247.pdf?src-supplier=Farnell, ComponentLink5URL=https://datasheet.ciiva.com/5974/485442-5974247.pdf?src-supplier=Farnell, ComponentLink6Description=https://datasheet.ciiva.com/5974/485442-5974251.pdf?src-supplier=Farnell, ComponentLink6URL=https://datasheet.ciiva.com/5974/485442-5974251.pdf?src-supplier=Farnell, ComponentLink7Description=https://datasheet.ciiva.com/5974/485442-5974239.pdf?src-supplier=Farnell, ComponentLink7URL=https://datasheet.ciiva.com/5974/485442-5974239.pdf?src-supplier=Farnell, Composition="Metal Film,Thin Film", Contact Plating=Tin, Depth=1.25mm, Features="Automotive AEC-Q200", Height=0.5mm, Lead Free="Lead Free", Length=2mm, Manufacturer Part Number=ERA-6AEB3481V, Mount="Surface Mount", Number of Pins=2, Number of Terminations=2, Packaging="Tape and Reel", Power Rating=125mW, Pricing 1="1=0.36000, 10=0.30200, 100=0.11820, 1000=0.04948, 2500=0.04536 (USD)", Radiation Hardening=No, RoHS=Yes, Stock 1=4330, Supplier 1=Digi-Key, Termination=Solder, Voltage Rating (DC)=100V, Width=1.25mm
R6: library part PTN0805E5002BST1, "RES 50K OHM 0.1% 1/5W 0805", Manufacturer=Vishay, Supplier Part Number 1=764-1535-6-ND, ComponentLink1Description=DigiKey, ComponentLink1URL=https://www.digikey.ca/product-detail/en/PTN0805E5002BST1/764-1535-1-ND/7103319/?itemSeq=274495083, Manufacturer Part Number=PTN0805E5002BST1, Pricing 1="1=0.78, 10=0.647, 100=0.4343 (USD)", Stock 1=3755, Supplier 1=Digi-Key
R7: library part ERA6AEB202V, "RES SMD 2K OHM 0.1% 1/8W 0805", Case/Package=0805, Case Code (Metric)=2012, Manufacturer=Panasonic, Max Operating Temperature=155°C, Max Power Dissipation=125mW, Min Operating Temperature=-55°C, Package Quantity=1, Resistance=2kR, Supplier Part Number 1=P2.0KDACT-ND, Temperature Coefficient=25ppm/°C, Tolerance=0.1%, Voltage Rating=100V, Case Code (Imperial)=0805, ComponentLink1Description=http://industrial.panasonic.com/www-data/pdf/AOA0000/AOA0000CE26.pdf?src-supplier=Future+Electronics, ComponentLink1URL=http://industrial.panasonic.com/www-data/pdf/AOA0000/AOA0000CE26.pdf?src-supplier=Future+Electronics, ComponentLink2Description=http://industrial.panasonic.com/www-data/pdf/AOA0000/AOA0000CE26.pdf?src-supplier=Avnet+Europe, ComponentLink2URL=http://industrial.panasonic.com/www-data/pdf/AOA0000/AOA0000CE26.pdf?src-supplier=Avnet+Europe, ComponentLink3Description=https://www.alliedelec.com/m/d/b6b0537e86f421aa7f5975bb1d8f429a.pdf?src-supplier=Allied+Electronics, ComponentLink3URL=https://www.alliedelec.com/m/d/b6b0537e86f421aa7f5975bb1d8f429a.pdf?src-supplier=Allied+Electronics, ComponentLink4Description=http://www.farnell.com/datasheets/485442.pdf?src-supplier=Element14, ComponentLink4URL=http://www.farnell.com/datasheets/485442.pdf?src-supplier=Element14, ComponentLink5Description=http://www.farnell.com/datasheets/1776116.pdf?src-supplier=Element14, ComponentLink5URL=http://www.farnell.com/datasheets/1776116.pdf?src-supplier=Element14, ComponentLink6Description=https://www.distrelec.biz/Web/Downloads/_t/ds/ERA_eng_tds.pdf?mime=application%2Fpdf&src-supplier=Distrelec, ComponentLink6URL=https://www.distrelec.biz/Web/Downloads/_t/ds/ERA_eng_tds.pdf?mime=application%2Fpdf&src-supplier=Distrelec, ComponentLink7Description=http://www.farnell.com/datasheets/2052875.pdf?src-supplier=Farnell, ComponentLink7URL=http://www.farnell.com/datasheets/2052875.pdf?src-supplier=Farnell, ComponentLink8Description=http://www.farnell.com/datasheets/2059650.pdf?src-supplier=Farnell, ComponentLink8URL=http://www.farnell.com/datasheets/2059650.pdf?src-supplier=Farnell, ComponentLink9Description=http://industrial.panasonic.com/www-data/pdf/AOA0000/AOA0000CE26.pdf?src-supplier=Avnet, ComponentLink9URL=http://industrial.panasonic.com/www-data/pdf/AOA0000/AOA0000CE26.pdf?src-supplier=Avnet, ComponentLink10Description=https://produktinfo.conrad.com/datenblaetter/450000-474999/453123-da-01-en-WIDERSTAND_0805_ERA.pdf?src-supplier=Conrad, ComponentLink10URL=https://produktinfo.conrad.com/datenblaetter/450000-474999/453123-da-01-en-WIDERSTAND_0805_ERA.pdf?src-supplier=Conrad, Composition="Thin Film", Contact Plating=Tin, Depth=1.25mm, Features="Automotive AEC-Q200", Height=0.5mm, Lead Free="Lead Free", Length=2mm, Manufacturer Part Number=ERA6AEB202V, Military Standard=Not, Mount="Surface Mount", Number of Pins=2, Number of Terminations=2, Packaging="Tape and Reel", Power Rating=125mW, Pricing 1="1=0.36, 10=0.302, 100=0.1182, 1000=0.04948, 2500=0.04536 (USD)", Radiation Hardening=No, REACH SVHC="No SVHC", Stock 1=110386, Supplier 1=Digi-Key, Termination=SMD/SMT, Voltage Rating (DC)=100V, Width=1.25mm
R8: library part ERA6AEB6041V, "RES SMD 6.04K OHM 0.1% 1/8W 0805", Case/Package=0805, Case Code (Metric)=2012, Manufacturer=Panasonic, Max Operating Temperature=155°C, Max Power Dissipation=125mW, Min Operating Temperature=-55°C, Package Quantity=1, Resistance=6.04kR, Supplier Part Number 1=P6.04KDACT-ND, Temperature Coefficient=25ppm/°C, Tolerance=0.1%, Voltage Rating=100V, Case Code (Imperial)=0805, ComponentLink1Description=http://www.mouser.com/ds/2/315/AOA0000C237-1100991.pdf?src-supplier=Mouser, ComponentLink1URL=http://www.mouser.com/ds/2/315/AOA0000C237-1100991.pdf?src-supplier=Mouser, ComponentLink2Description=http://www.farnell.com/datasheets/485442.pdf?src-supplier=Element14, ComponentLink2URL=http://www.farnell.com/datasheets/485442.pdf?src-supplier=Element14, ComponentLink3Description=http://industrial.panasonic.com/www-data/pdf/AOA0000/AOA0000CE26.pdf?src-supplier=Avnet, ComponentLink3URL=http://industrial.panasonic.com/www-data/pdf/AOA0000/AOA0000CE26.pdf?src-supplier=Avnet, ComponentLink4Description=http://www.farnell.com/datasheets/485442.pdf?src-supplier=Farnell, ComponentLink4URL=http://www.farnell.com/datasheets/485442.pdf?src-supplier=Farnell, ComponentLink5Description=http://uk.rs-online.com/webdocs/0eb1/0900766b80eb1d8c.pdf?src-supplier=RSComponents, ComponentLink5URL=http://uk.rs-online.com/webdocs/0eb1/0900766b80eb1d8c.pdf?src-supplier=RSComponents, ComponentLink6Description=http://www.produktinfo.conrad.com/datenblaetter/1100000-1199999/001181293-da-01-en-WIDERSTAND_ERA_0805_6K04_0_1__5000ST.pdf?src-supplier=Conrad, ComponentLink6URL=http://www.produktinfo.conrad.com/datenblaetter/1100000-1199999/001181293-da-01-en-WIDERSTAND_ERA_0805_6K04_0_1__5000ST.pdf?src-supplier=Conrad, Composition="Metal Film,Thin Film", Contact Plating=Tin, Depth=1.25mm, Features="Automotive AEC-Q200", Height=0.5mm, Lead Free="Lead Free", Length=2mm, Manufacturer Part Number=ERA6AEB6041V, Mount="Surface Mount", Number of Pins=2, Number of Terminations=2, Packaging="Tape and Reel", Power Rating=125mW, Pricing 1="1=0.36, 10=0.302, 100=0.1182, 1000=0.04948, 2500=0.04536 (USD)", Radiation Hardening=No, Stock 1=15898, Supplier 1=Digi-Key, Termination=SMD/SMT, Voltage Rating (DC)=100V, Weight=0.000194oz, Width=1.25mm
R9 R10: library part ERJ6ENF1500V, "RES SMD 150 OHM 1% 1/8W 0805", Case/Package=0805, Case Code (Metric)=2012, Manufacturer=Panasonic, Max Operating Temperature=155°C, Max Power Dissipation=125mW, Min Operating Temperature=-55°C, Package Quantity=1, Resistance=150R, Supplier Part Number 1=P150CCT-ND, Temperature Coefficient=100ppm/°C, Tolerance=1%, Voltage Rating=150V, Case Code (Imperial)=0805, ComponentLink1Description=http://www.farnell.com/datasheets/426256.pdf?src-supplier=Element14, ComponentLink1URL=http://www.farnell.com/datasheets/426256.pdf?src-supplier=Element14, ComponentLink2Description=https://www.alliedelec.com/m/d/623f45ff1957d936ff56d46fd1c28cac.pdf?src-supplier=Allied+Electronics, ComponentLink2URL=https://www.alliedelec.com/m/d/623f45ff1957d936ff56d46fd1c28cac.pdf?src-supplier=Allied+Electronics, ComponentLink3Description=http://www.farnell.com/datasheets/1678782.pdf?src-supplier=Element14, ComponentLink3URL=http://www.farnell.com/datasheets/1678782.pdf?src-supplier=Element14, ComponentLink4Description=http://industrial.panasonic.com/www-data/pdf/AOA0000/AOA0000CE2.pdf?src-supplier=Avnet, ComponentLink4URL=http://industrial.panasonic.com/www-data/pdf/AOA0000/AOA0000CE2.pdf?src-supplier=Avnet, ComponentLink5Description=http://www.mouser.com/ds/2/315/AOA0000C283-1093288.pdf?src-supplier=Mouser, ComponentLink5URL=http://www.mouser.com/ds/2/315/AOA0000C283-1093288.pdf?src-supplier=Mouser, ComponentLink6Description=http://www.farnell.com/datasheets/426256.pdf?src-supplier=Farnell, ComponentLink6URL=http://www.farnell.com/datasheets/426256.pdf?src-supplier=Farnell, Composition="Thick Film", Contact Plating=Tin, Depth=1.25mm, Features="Automotive AEC-Q200", Height=0.6mm, Lead Free="Lead Free", Length=2mm, Manufacturer Part Number=ERJ6ENF1500V, Military Standard=Not, Mount="Surface Mount", Number of Pins=2, Number of Terminations=2, Packaging="Tape and Reel", Power Rating=125mW, Pricing 1="1=0.1, 10=0.081, 100=0.0311, 1000=0.01367, 2500=0.01181 (USD)", Radiation Hardening=No, REACH SVHC="No SVHC", Stock 1=125951, Supplier 1=Digi-Key, Termination=SMD/SMT, Voltage Rating (DC)=150V, Width=0.049inch, Working Voltage=150V
R11: library part ERA6AEB5231V, "RES SMD 5.23K OHM 0.1% 1/8W 0805", Case/Package=0805, Case Code (Metric)=2012, Manufacturer=Panasonic, Max Operating Temperature=155°C, Max Power Dissipation=125mW, Min Operating Temperature=-55°C, Package Quantity=1, Resistance=5.23kR, Supplier Part Number 1=P5.23KDACT-ND, Temperature Coefficient=25ppm/°C, Tolerance=0.1%, Voltage Rating=100V, Case Code (Imperial)=0805, ComponentLink1Description=http://uk.rs-online.com/webdocs/0eb1/0900766b80eb1d8c.pdf?src-supplier=RSComponents, ComponentLink1URL=http://uk.rs-online.com/webdocs/0eb1/0900766b80eb1d8c.pdf?src-supplier=RSComponents, ComponentLink2Description=http://www.farnell.com/datasheets/485442.pdf?src-supplier=Element14, ComponentLink2URL=http://www.farnell.com/datasheets/485442.pdf?src-supplier=Element14, ComponentLink3Description=http://www.farnell.com/datasheets/485442.pdf?src-supplier=Farnell, ComponentLink3URL=http://www.farnell.com/datasheets/485442.pdf?src-supplier=Farnell, ComponentLink4Description=http://industrial.panasonic.com/www-data/pdf/AOA0000/AOA0000CE26.pdf?src-supplier=Avnet+Europe, ComponentLink4URL=http://industrial.panasonic.com/www-data/pdf/AOA0000/AOA0000CE26.pdf?src-supplier=Avnet+Europe, ComponentLink5Description=http://industrial.panasonic.com/www-data/pdf/AOA0000/AOA0000CE26.pdf?src-supplier=Avnet, ComponentLink5URL=http://industrial.panasonic.com/www-data/pdf/AOA0000/AOA0000CE26.pdf?src-supplier=Avnet, ComponentLink6Description=http://www.produktinfo.conrad.com/datenblaetter/1100000-1199999/001181288-da-01-en-WIDERSTAND_ERA_0805_5K23_0_1__5000ST.pdf?src-supplier=Conrad, ComponentLink6URL=http://www.produktinfo.conrad.com/datenblaetter/1100000-1199999/001181288-da-01-en-WIDERSTAND_ERA_0805_5K23_0_1__5000ST.pdf?src-supplier=Conrad, Composition="Metal Film,Thin Film", Contact Plating=Tin, Depth=1.25mm, Features="Automotive AEC-Q200", Height=0.5mm, Lead Free="Lead Free", Length=2mm, Manufacturer Part Number=ERA6AEB5231V, Military Standard=Not, Mount="Surface Mount", Number of Pins=2, Number of Terminations=2, Packaging="Tape and Reel", Power Rating=125mW, Pricing 1="1=0.36, 10=0.302, 100=0.1182, 1000=0.04948, 2500=0.04536 (USD)", Radiation Hardening=No, REACH SVHC="No SVHC", Stock 1=15465, Supplier 1=Digi-Key, Termination=SMD/SMT, Voltage Rating (DC)=100V, Width=1.25mm
U1: "IC COMPAR PWR RRI DL PP 8VSSOP", Case/Package=VSSOP, Input Bias Current=50pA, Input Offset Voltage (Vos)=5mV, Manufacturer="Texas Instruments", Max Operating Temperature=125°C, Max Supply Current=40uA, Max Supply Voltage=5.5V, Min Operating Temperature=-40°C, Min Supply Voltage=2.7V, Nominal Supply Current=50uA, Package Quantity=80, Power Supply Rejection Ratio (PSRR)=85dB, Supplier Part Number 1=296-34992-ND, Common Mode Rejection Ratio=70dB, ComponentLink1Description=digikey.ca, ComponentLink1URL=https://www.digikey.ca/product-detail/en/texas-instruments/TLV3202AIDGK/296-34992-ND/3588984, ComponentLink2Description=https://datasheet.ciiva.com/12288/tlv3202-193866-12288098.pdf, ComponentLink2URL=https://datasheet.ciiva.com/12288/tlv3202-193866-12288098.pdf, ComponentLink3Description=https://datasheet.ciiva.com/23702/1645741-23702136.pdf, ComponentLink3URL=https://datasheet.ciiva.com/23702/1645741-23702136.pdf, ComponentLink4Description=https://datasheet.ciiva.com/8066/1645741-8066013.pdf, ComponentLink4URL=https://datasheet.ciiva.com/8066/1645741-8066013.pdf, Height=0.95mm, Hysteresis=1.2mV, Lead Free="Lead Free", Length=3.1mm, Manufacturer Part Number=TLV3202AIDGK, Max Input Current=50pA, Mount="Surface Mount", Number of Channels=2, Number of Elements=2, Number of Pins=8, Packaging=Rail/Tube, Pricing 1="1=1.77, 80=1.5, 160=1.278, 560=1.05, 1040=0.87 (USD)", Propagation Delay=50ns, Quiescent Current=50uA, Radiation Hardening=No, REACH SVHC="No SVHC", Response Time=0.047us, Stock 1=14534, Supplier 1=Digi-Key, Supplier 2=Digi-Key, Type="General Purpose", Width=3.1mm
U2 U5: "The SN74AHC1G04 contains one inverter gate. The / device performs the Boolean function Y = A bar.", Case/Package=SC, High Level Output Current=-8mA, Low Level Output Current=8mA, Manufacturer="Texas Instruments", Manufacturer Part Number=SN74AHC1G04DCKR, Max Operating Temperature=125°C, Max Supply Voltage=5.5V, Min Operating Temperature=-40°C, Min Supply Voltage=2V, Package Quantity=1, Quiescent Current=1uA, Supplier Part Number 1=296-1090-1-ND, ComponentLink1Description=Digi-Key, ComponentLink1URL=https://www.digikey.com/product-detail/en/texas-instruments/SN74AHC1G04DCKR/296-1090-1-ND/276358, ComponentLink2Description=http://www.farnell.com/datasheets/1759812.pdf?src-supplier=Element14, ComponentLink2URL=http://www.farnell.com/datasheets/1759812.pdf?src-supplier=Element14, ComponentLink3Description=http://www.jameco.com/Jameco/Products/ProdDS/912915.pdf?src-supplier=Jameco, ComponentLink3URL=http://www.jameco.com/Jameco/Products/ProdDS/912915.pdf?src-supplier=Jameco, ComponentLink4Description=http://www.ti.com/lit/ds/symlink/sn74ahc1g04.pdf?src-supplier=Digi-Key, ComponentLink4URL=http://www.ti.com/lit/ds/symlink/sn74ahc1g04.pdf?src-supplier=Digi-Key, ComponentLink5Description=https://www.verical.com/server-webapp/html/getDatasheet?partID=53378&src-supplier=Verical, ComponentLink5URL=https://www.verical.com/server-webapp/html/getDatasheet?partID=53378&src-supplier=Verical, ComponentLink6Description=http://www.farnell.com/datasheets/2024272.pdf?src-supplier=Element14, ComponentLink6URL=http://www.farnell.com/datasheets/2024272.pdf?src-supplier=Element14, ComponentLink7Description=http://www.ti.com/general/docs/lit/getliterature.tsp?genericPartNumber=SN74AHC1G04&amp;&amp;fileType=pdf&src-supplier=Avnet+Asia, ComponentLink7URL=http://www.ti.com/general/docs/lit/getliterature.tsp?genericPartNumber=SN74AHC1G04&amp;&amp;fileType=pdf&src-supplier=Avnet+Asia, Contact Plating=Gold, Height=0.9mm, Lead Free="Lead Free", Length=2mm, Logic Function=Buffer,Inverter,Inverting, Max Output Current=8mA, Mount="Surface Mount", Number of Bits=1, Number of Circuits=1, Number of Elements=1, Number of Gates=1, Number of Inputs=1, Number of Pins=5, Output Current=8mA, Packaging="Tape and Reel", Pricing 1="1=0.43, 10=0.32, 100=0.1996, 500=0.13658, 1000=0.10506 (USD)", Propagation Delay=12ns, Radiation Hardening=No, REACH SVHC="No SVHC", Schmitt Trigger Input=No, Stock 1=120362, Supplier 1=Digi-Key, Termination=SMD/SMT, Turn-On Delay Time=10.6ns, Weight=8.8E-05oz, Width=1.25mm
U3: library part SN74LVC2G08DCUR, "Dual 2-Input Positive-AND Gate", Supplier Part Number 1=296-26615-1-ND, Supplier 1=Digi-Key
U4: "Comparator Single R-R I/P 5.5V 5-Pin SC-70 T/R", Case/Package=SOT-23-5, Input Bias Current=5nA, Input Offset Voltage (Vos)=5mV, Manufacturer="Texas Instruments", Max Operating Temperature=125°C, Max Supply Current=40uA, Max Supply Voltage=5.5V, Min Operating Temperature=-40°C, Min Supply Voltage=2.7V, Nominal Supply Current=50uA, Package Quantity=3000, Power Supply Rejection Ratio (PSRR)=85dB, Supplier Part Number 1=296-36751-1-ND, Common Mode Rejection Ratio=85dB, ComponentLink1Description=https://datasheet.ciiva.com/29635/tlv3201-29635045.pdf?src-supplier=Digi-Key, ComponentLink1URL=https://datasheet.ciiva.com/29635/tlv3201-29635045.pdf?src-supplier=Digi-Key, ComponentLink2Description=https://datasheet.ciiva.com/2966/tlv3202-2966812.pdf?src-supplier=Avnet, ComponentLink2URL=https://datasheet.ciiva.com/2966/tlv3202-2966812.pdf?src-supplier=Avnet, Hysteresis=1.2mV, Lead Free="Lead Free", Manufacturer Part Number=TLV3201AIDCKR, Max Input Current=5nA, Mount="Surface Mount", Number of Channels=1, Number of Elements=1, Number of Pins=5, Packaging="Tape and Reel", Pricing 1="1=1.36000, 10=1.21500, 100=0.94760, 500=0.78280, 1000=0.61800 (USD)", Propagation Delay=50ns, Quiescent Current=40uA, Radiation Hardening=No, Response Time=0.047us, RoHS=Yes, Stock 1=34988, Supplier 1=Digi-Key, Type="General Purpose"

## Via types
v1: diameter 0.7, hole 0.5, Top Layer to Bottom Layer, 24 vias
v2: diameter 6, hole 4.2, Top Layer to Bottom Layer, 4 vias

## Nets (pads, with @x,y where several pads share a name; then routed paths per layer and width w, separated by ;. In a path a pad name is that pad's centre, name@x,y a point inside that pad or via, vN(x,y) a via of type N, cw(c..) or ccw(c..) an arc to the next point about the centre after c; other vN are vias at no path point)
5V: C2.2 J1.3 R1.2 R3.2 R5.2 R7.2 R9.2 R10.2 R12.2 U1.8 U2.5 U3.8 U4.5 U5.5 | length 88.7
  Top Layer w0.254: U3.8 26.05,13.15 26.3,12.9 26.9,12.9 33.2,12.9 34,13.7
  Top Layer w0.3: 26,7.8 26.9,7.8 28.9,5.8 U5.5
  Top Layer w0.4: R3.2@17.3,6.5 17.7,6.5 20.2,9 21.8,9 22.7,8.1 22.7,6.45 ; R1.2@21.05,6.45 22.7,6.45 ; R9.2@22,24.4 23.4,23 ; R7.2@24.5,6.4 25.4,6.4 26,7 26,7.8 26,8.6 25.3,9.3 24.2,9.3 23.4,10.1 23.4,13 24.2,13.8 ; R7.2 22.7,6.45 ; R10.2 24.8,24.4 23.4,23 ; U3.8@25.97,13.8 24.2,13.8 ; 34,17.2 34,13.7 34.8,12.9 37.7,12.9 ; R5.2 39.1,11.5 37.7,12.9 ; U4.5 42.45,18.8 39.6,18.8 37.7,16.9 37.7,12.9 ; 23.4,23 23.4,14.6 24.2,13.8
  Top Layer w0.5: C2.2@14.4,20.55 14.55,20.7 15.3,20.7 15.6,21 15.6,23.3 16.7,24.4 19.6,24.4 ; R12.2@19.6,22.35 19.6,24.4 ; R9.2@22,24.4 19.6,24.4 ; R9.2 R9.2@22.025,24.4 ; U2.5@30.53,19.3 31.9,19.3 34,17.2
BRAKE_FUSE: F2.2 R12.1 U1.5 | length 7.3
  Top Layer w0.254: R12.1 19.825,20.65 19.175,20 U1.5 19.625,16.9 19.975,16.55 F2.2
BRAKE_SENS: F2.1 J1.2 | length 11.4
  Top Layer w0.254: J1.2 12.37,15.2 22.075,15.2 F2.1
BRAKE_THRES: U1.7 U3.2 | length 23.6
  Top Layer w0.2: v1(15.8,19.1) 16.496,19.1 17.864,17.732 17.864,16.911 U1.7 ; v1(24.7,13) 26.55,11.15 U3.2
  Bottom Layer w0.2: v1(15.8,19.1) 15.8,11.8 16.2,11.4 22.9,11.4 24.5,13 v1(24.7,13)
BSPD_OUT: D2.2 J2.1 J2.2 U5.4 | length 33.1
  Top Layer w0.3: v1(29.1,3.3) U5.4 29.35,4.5 33.5,8.65 J2.2 J2.1 ; v1(29.65,23.1) D2.2
  Bottom Layer w0.3: v1(29.1,3.3) 29.1,11.21 29.8,11.91 29.8,12 30.8,13 30.8,21.95 v1(29.65,23.1)
BSPD_SIG: C1.2 R4.2 R6.2 U4.3 | length 18.1
  Top Layer w0.254: R6.2@36.2,28.6 36.2,21.4 37.6,20 42.7,20 43.223,19.477 43.223,17.777 43.75,17.25 U4.3
CRT_FUSE: F1.2 R3.1 U1.3 | length 10.7
  Top Layer w0.4: F1.2 14.85,12.75 15.9,13.8 18.091,13.8 ; R3.1 18.525,9.175 U1.3 18.525,13.375 18.1,13.8
CRT_SENS: F1.1 J1.1 | length 4.3
  Top Layer w0.3: J1.1 11.32,11.47 F1.1
CRT_THRES: U1.1 U3.1 | length 12.7
  Top Layer w0.254: v1(16.475,10.625) 16.475,12.225 16.75,12.5 U1.1@17.2,12.5 ; v1(24.7,11.5) 25.55,10.65 U3.1
  Bottom Layer w0.254: v1(16.475,10.625) 23.575,10.625 23.6,10.6 24.5,11.5 v1(24.7,11.5)
FET_GATE: Q1.1 U2.4 | length 5.8
  Top Layer w0.254: U2.4@29.1,19.3 29.1,18.625 29.1,18.4 31.5,16 Q1.1@33,16
GND: C1.1 C2.1 D1.2 J1.4 Q1.2 R2.1 R8.1 R11.1 U1.4 U2.3 U3.4 U4.2 U5.3 | length 0.1
  Top Layer w0.254: C1.1 C1.1@34.55,25
  other v1: 22.7,3.7 12.575,6.375 20.7,12.3 30.1,14 39.1,14 24.7,15.1 27.5,21.2 18.4,21.5 34.5,23.3 31.4,27.1
  other v2: 6.4,4 43.4,4 6.4,28.6 43.4,28.6
NetD1_1: D1.1 R9.1 | length 7.3
  Top Layer w0.4: R9.1@22,26.1 24.7,28.8 D1.1
NetD2_1: D2.1 R10.1 | length 3.9
  Top Layer w0.4: R10.1 25,26.15 26.55,24.6 D2.1
NetQ1_3: Q1.3 R4.1 | length 7.1
  Top Layer w0.254: R4.1@34.4,21.5 35.85,20.05 Q1.3
SIG_OUT: U3.3 U5.2 | length 15.3
  Top Layer w0.2: U5.2 27.75,5.15 28,4.9 v1(28,3.3) ; U3.3 27.05,11.35 27.9,12.2 v1(29.1,12.2)